# Altium PCB prototype.PcbDoc
Units mm, origin at the board's own origin, x right, y up, seen from the top; angles counter-clockwise.
Board outline 50 x 50 mm, 4 copper layers (Top Layer, GND, VCC, Bottom Layer), stack 0.971 mm thick; 16 components, 13 nets, 60 pads, 0 vias.
Unrouted connection lines stored in the file: 40.
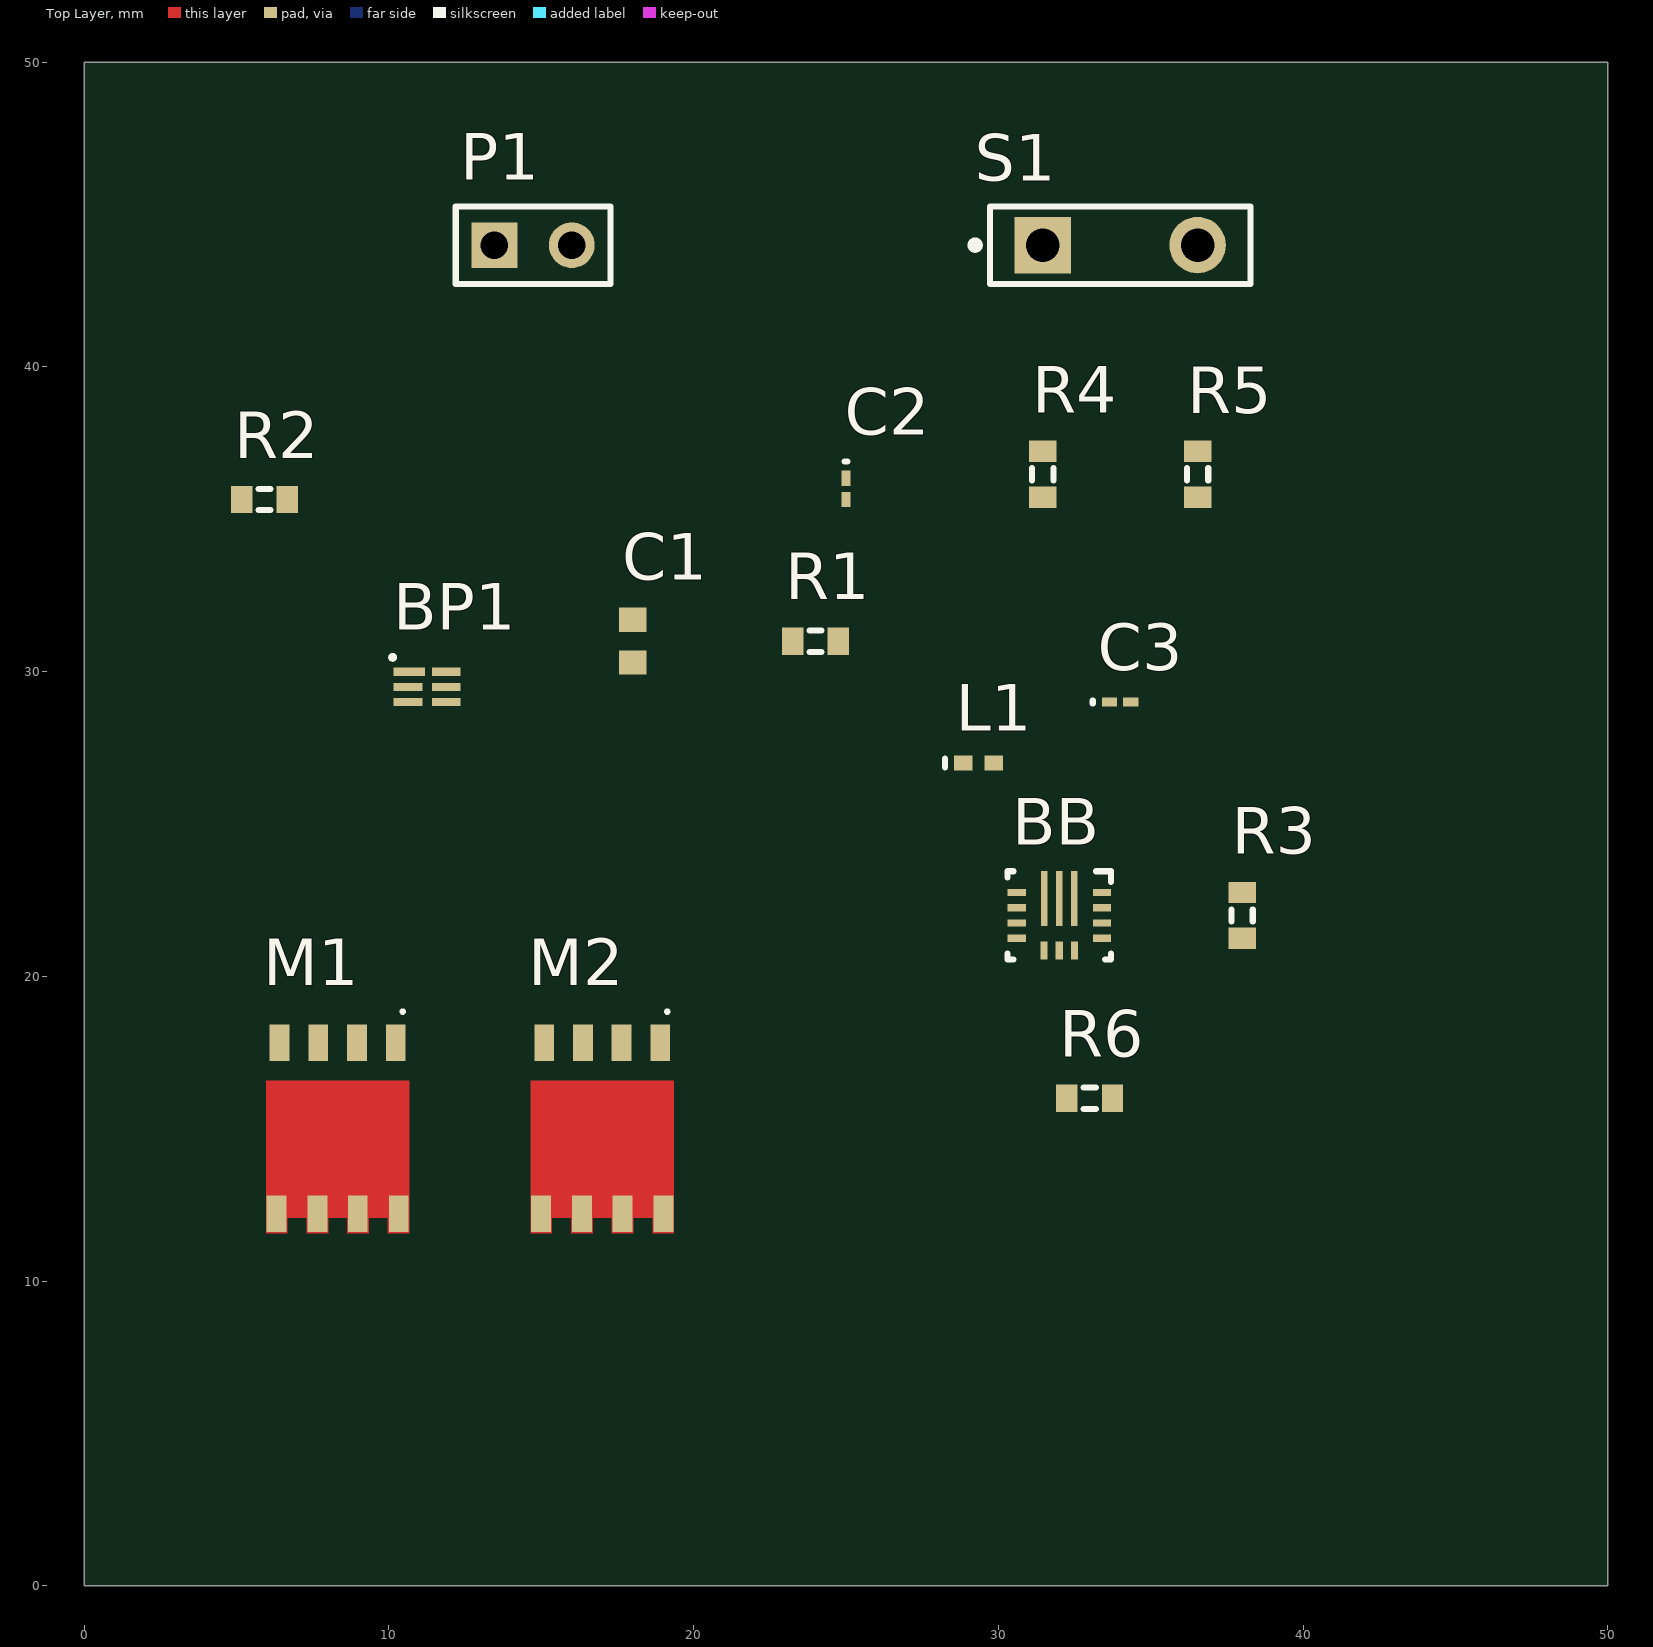
[diagram p0: Top Layer view]
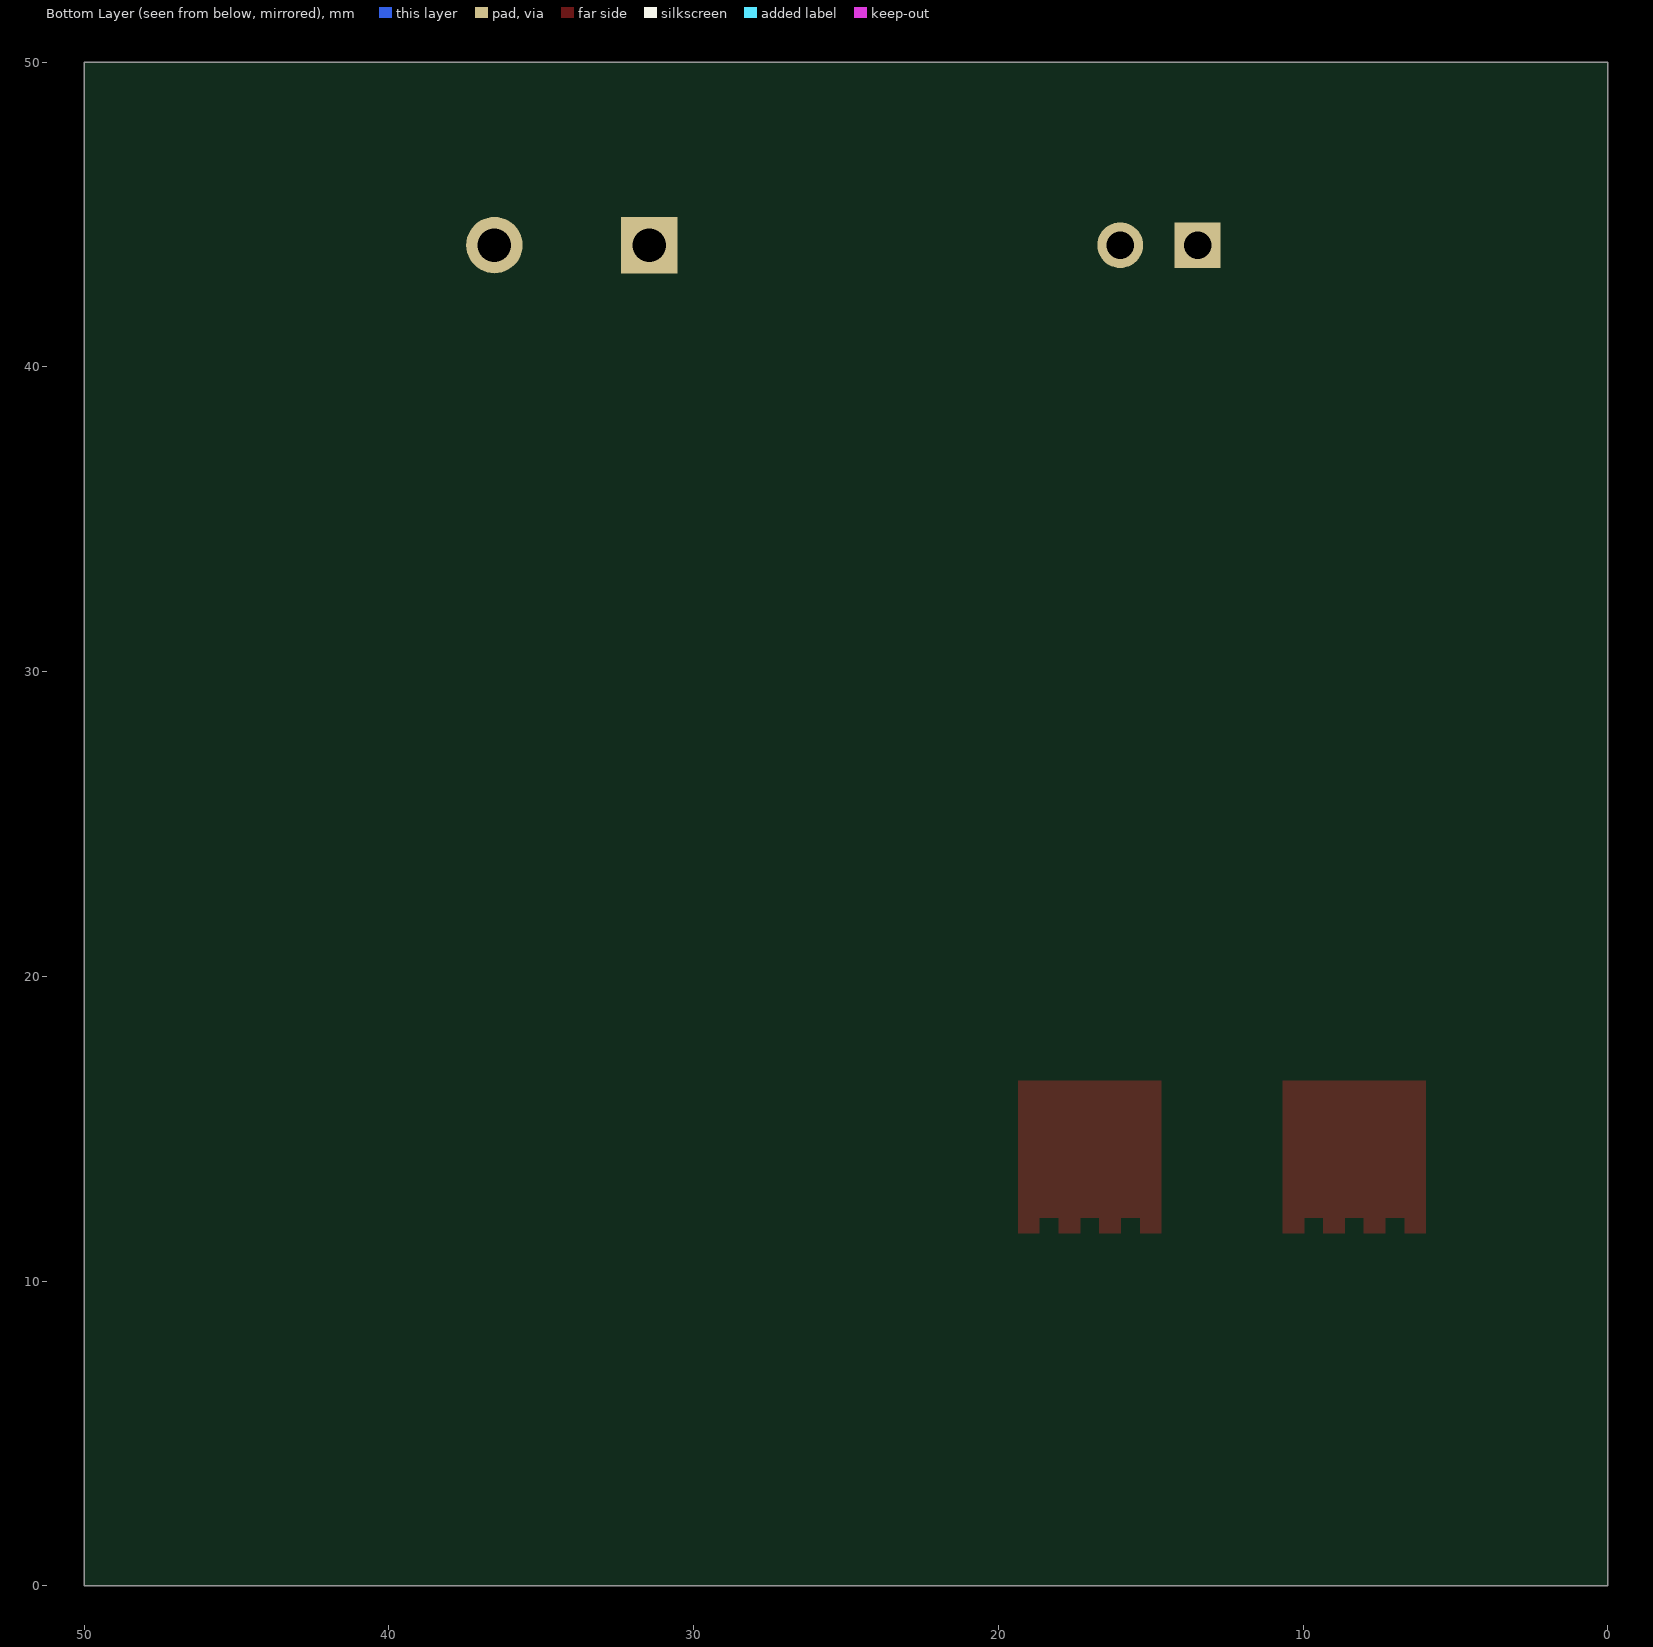
[diagram p1: Bottom Layer view, seen from below]
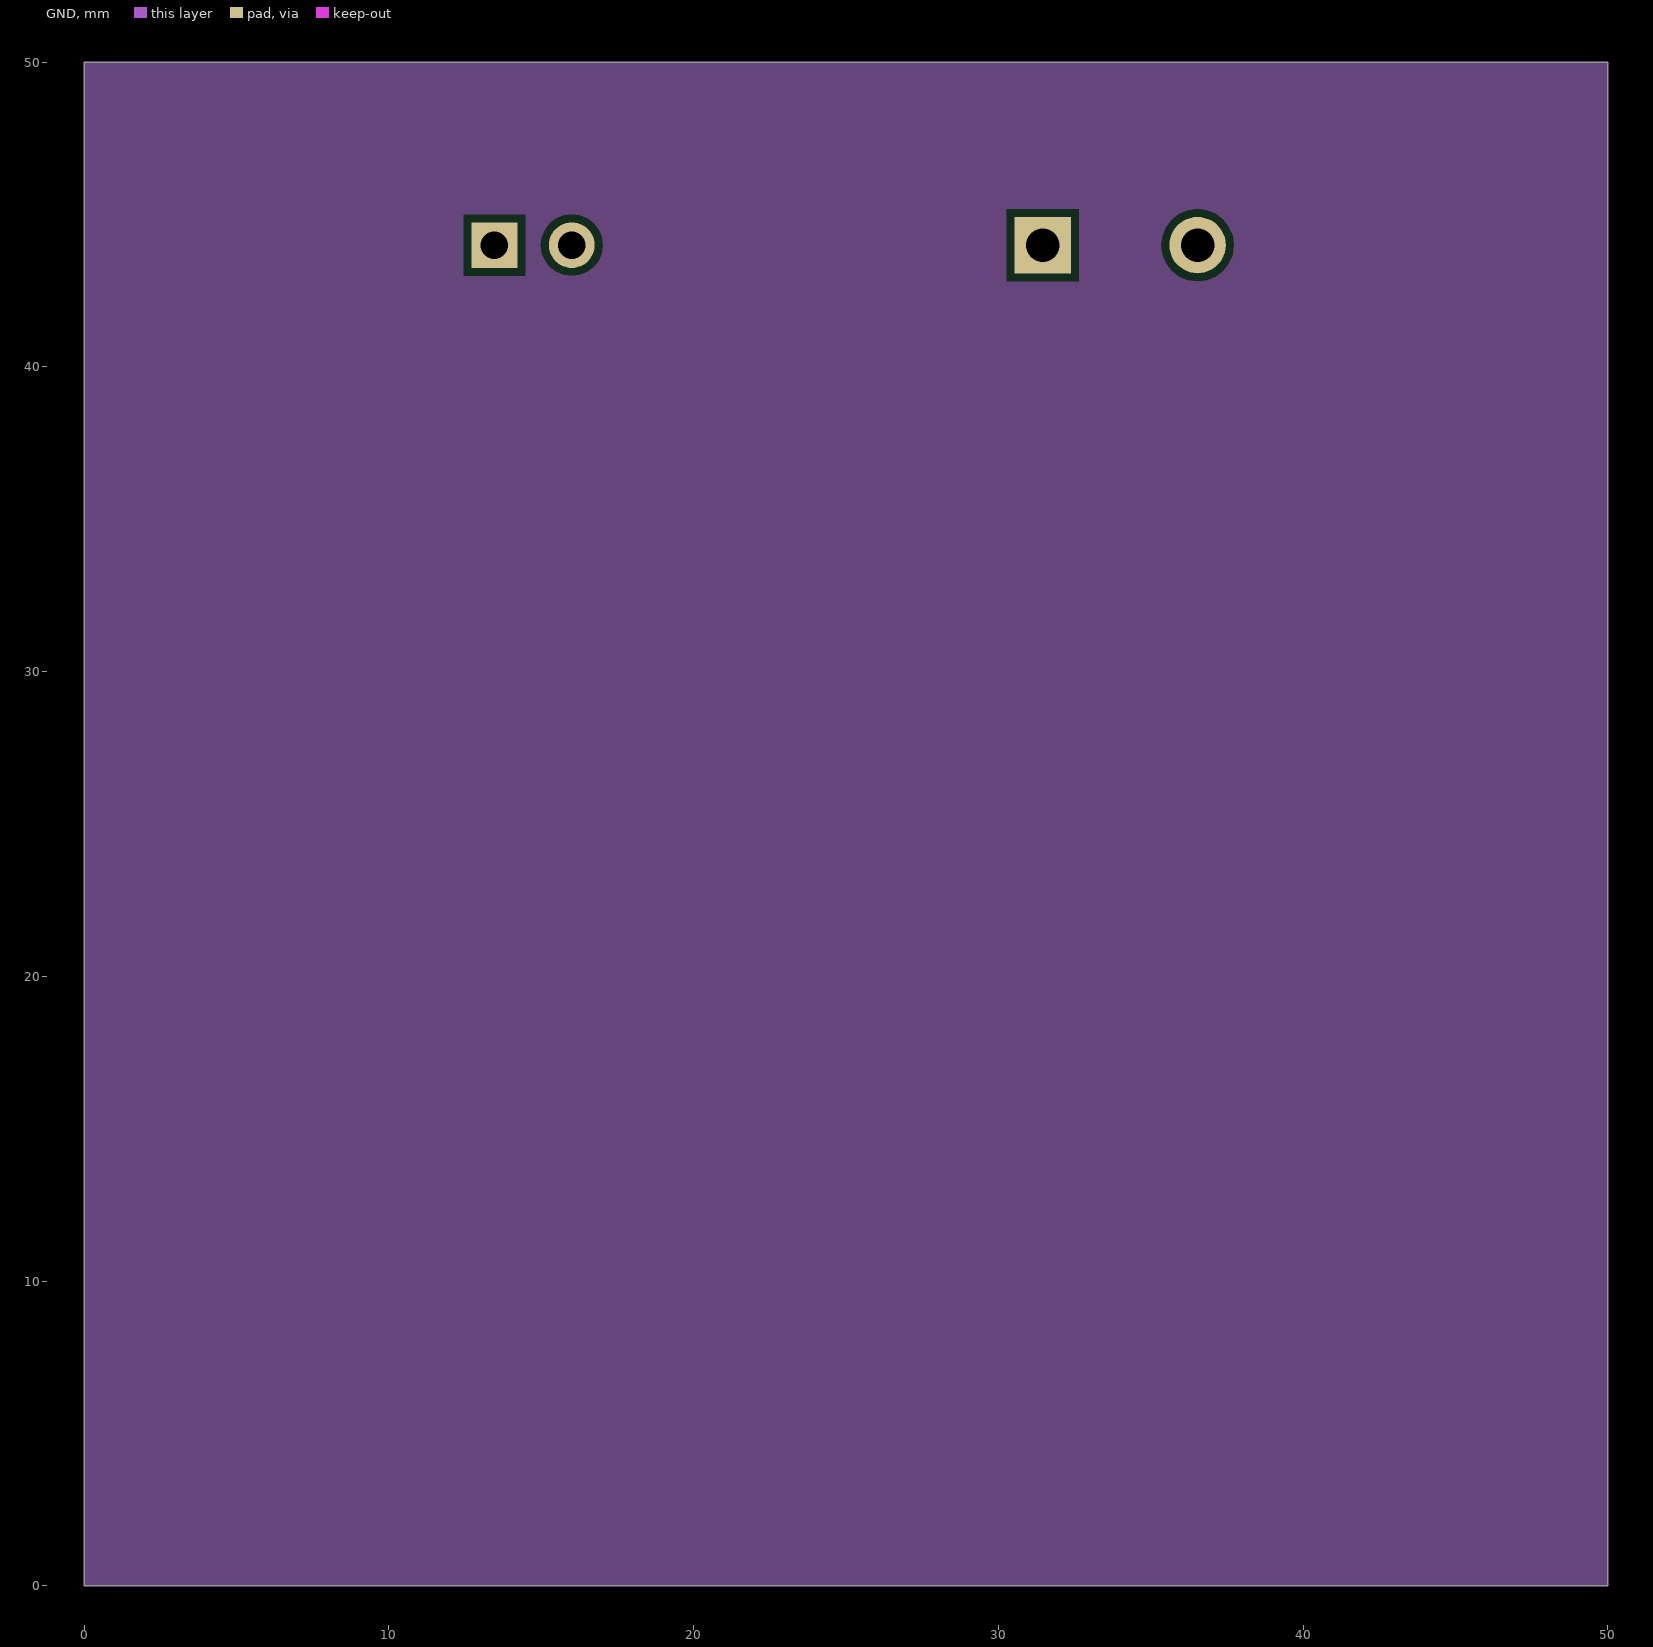
[diagram p2: GND]

## Layer stack, top to bottom
Top Solder: solder mask 0.0102, Solder Resist, Dk 3.5
Top Layer: signal copper 0.0356
Dielectric 1: dielectric 0.32, FR-4, Dk 4.8
GND: signal copper 0.036
Dielectric 2: dielectric 0.254, Dk 4.2
VCC: signal copper 0.036
Dielectric 3: dielectric 0.254, Dk 4.2
Bottom Layer: signal copper 0.0356
Bottom Solder: solder mask 0.0102, Solder Resist, Dk 3.5

## Board outline
0,0 0,50 50,50 50,0

## Design rules (kind name [scope] priority, off if disabled: settings)
Clearance [All] p1: gap=0.254 ignorepadtopadclearanceinfootprint=FALSE except(0: Arc-Hole Track-Hole SMDPad-Hole THPad-Hole Via-Hole Fill-Hole Poly-Hole Region-Hole Text-Hole)
PlaneConnect [All] p1: planeconnectstyle=Direct reliefexpansion=0.508 reliefentries=4 reliefconductorwidth=0.254 reliefairgap=0.254
PolygonConnect [All] p1: connectstyle=Direct reliefconductorwidth=0.254 reliefentries=4 polygonreliefangle="90 Angle" airgapwidth=0.254
RoutingVias [All] p1: holewidth=0.711 width=1.27 viastyle="Through Hole" minholewidth=0.711 minwidth=1.27 maxholewidth=0.711 maxwidth=1.27
SolderMaskExpansion [All] p1: expansion=0.102
Width [All] p1: maxlimit=0.254 minlimit=0.254 preferedwidth=0.254
29 further rules are at their usual default settings.

## Components (designator, comment, footprint, x,y, rotation, side; value= is the part's Value field where it differs from the comment)
BB "TPS630250" RNC0014A 32,22 r270 top
BP1 "BQ2972" SON50P150X150X80-6N 11.255,29.5 r0 top
C1 "0.1uF" 1608[0603] 18,31 r90 top
C2 "10uF" 0603 25,36 r270 top
C3 "47uF" 0603 34,29 r0 top
L1 "1uH" 0402-A 29.35,27 r0 top
M1 "BSC026NE2LS5" INF-PG-TDSON-8-1_V 8.315,15 r180 top
M2 "BSC026NE2LS5" INF-PG-TDSON-8-1_V 17,15 r180 top
P1 "Header 2" HDR1X2 13.46,44 r0 top
R1 "330" J1-0603 24,31 r0 top
R2 "2.2K" J1-0603 5.915,35.65 r180 top
R3 "560K" J1-0603 38,22 r90 top
R4 "1K" J1-0603 31.46,36.48 r90 top
R5 "1K" J1-0603 36.54,36.48 r90 top
R6 "180K" J1-0603 33,16 r0 top
S1 "SW-PB" SPST-2 34,44 r0 top

## Footprints (in the part's own frame and the unit in brackets; to place one, negate y for a bottom-side part, rotate by r counter-clockwise, add the part's x,y. Pads: shape width x height; smd on the part's side, far side on the other; paste and mask are expansions set on the pad)
0402-A [mm] "Chip Inductor, Body 1.0x0.5mm, IPC High Density"
  rect 0.6x0.5 smd: 1(-0.5,0) 2(0.5,0)
  silkscreen extent -1.1,-0.15 -1.1,0.15, body extent -0.55,-0.3 0.55,0.3, height 0.55
0603 [mm] "Chip Inductor, Body 0.6x0.3mm, IPC High Density"
  rect 0.5x0.3 smd: 1(-0.35,0) 2(0.35,0)
  silkscreen extent -0.9,-0.05 -0.9,0.05, body extent -0.33,-0.18 0.33,0.18, height 0.55
1608[0603] [mm] "Chip Capacitor, Body 1.6x0.8mm, IPC High Density"
  rect 0.8x0.9 smd: 1(-0.7,0) 2(0.7,0)
  body extent -0.87,-0.48 0.87,0.48, height 1.3
HDR1X2 [mm] "Connector; Header; 2 Position"
  rect 1.5x1.5 hole 0.9: 1(0,0)
  round 1.5 hole 0.9: 2(2.54,0)
  silkscreen extent -1.27,-1.27 3.81,1.27
INF-PG-TDSON-8-1_V [mm] "TDSON, 8-Leads, Body 6.15x5.15mm, Pitch 1.27mm"
  rect 0.65x1.2 smd: 1(-1.905,-2.825) 1(-0.635,-2.825) 1(0.635,-2.825) 2(1.905,-2.825) 3(-2.007,2.794) 3(-0.66,2.794) 3(0.66,2.794) 3(2.007,2.794)
  Top Layer region: -2.35,2.925 -2.35,-1.575 2.35,-1.575 2.35,2.925
  Top Layer region: -2.35,2.925 -1.65,2.925 -1.65,3.425 -2.35,3.425
  Top Layer region: 1.65,2.925 2.35,2.925 2.35,3.425 1.65,3.425
  Top Layer region: -1.015,2.925 -0.315,2.925 -0.315,3.425 -1.015,3.425
  Top Layer region: 0.315,2.925 1.015,2.925 1.015,3.425 0.315,3.425
  silkscreen extent -2.23,-3.94 -2.03,-3.74, body extent -2.54,-2.93 2.61,2.97, height 1
J1-0603 [mm] "Chip Resistor, Body 1.6x0.8mm, IPC High Density"
  rect 0.7x0.9 smd: 1(-0.75,0) 2(0.75,0)
  silkscreen extent -0.2,-0.35 0.2,0.35, body extent -0.85,-0.48 0.85,0.48, height 0.9
RNC0014A [mm]
  rect 1.79x0.22 smd paste-0.882 mask+0.051: 1(-0.555,0.49) 2(-0.555,0) 3(-0.555,-0.49)
  rect 0.24x0.6 smd paste+0 mask+0.051: 4(-0.75,-1.4) 5(-0.25,-1.4) 6(0.25,-1.4) 7(0.75,-1.4) 11(0.75,1.4) 12(0.25,1.4) 13(-0.25,1.4) 14(-0.75,1.4)
  rect 0.6x0.24 smd paste+0 mask+0.051: 8(1.15,-0.5) 9(1.15,0) 10(1.15,0.5)
  silkscreen extent -1.45,-1.7 1.45,1.7, body extent -1.3,-1.55 1.3,1.55, height 1
SON50P150X150X80-6N [mm]
  rect 1.02x0.27 smd: 1(-0.59,0.5)
  rect 0.94x0.27 smd: 2(-0.63,0) 3(-0.63,-0.5) 4(0.63,-0.5) 5(0.63,0) 6(0.63,0.5)
  silkscreen extent -1.2,0.9 -1.06,1.04
SPST-2 [mm] "Switch; 2 Leads"
  rect 1.85x1.85 hole 1.1: 1(-2.54,0)
  round 1.85 hole 1.1: 2(2.54,0)
  silkscreen extent -4.89,-1.27 4.28,1.27

## Part data
BB: "Buck-boost converter"
BP1: "Battery protection"
C1 C2 C3: library part Cap, "Capacitor", LatestRevisionDate=17-Jul-2002, LatestRevisionNote="Re-released for DXP Platform.", PackageDescription="Radial Cap, Thru-Hole; 2 Leads; 0.3 in Pin Spacing", PackageReference=RAD-0.3, Published=8-Jun-2000, Publisher="Altium Limited"
L1: library part Inductor, "Inductor", Code_IEC=1005, Code_JEITA=0402, LatestRevisionDate=29-May-2009, LatestRevisionNote="IPC-7351 Footprint Added.", PackageDescription="Chip Inductor", PackageReference=0402-A, Published=8-Jun-2000, Publisher="Altium Limited"
M1 M2: "MOSFET"
P1: "Header, 2-Pin", LatestRevisionDate=17-Jul-2002, LatestRevisionNote="Re-released for DXP Platform.", Publisher="Altium Limited"
R1 R2 R3 R4 R5 R6: library part Res3, "Resistor", LatestRevisionDate=29-May-2009, LatestRevisionNote="IPC-7351 Footprint Added.", PackageDescription="Chip Resistor", PackageReference=J1-0603, Published=8-Jun-2000, Publisher="Altium Limited"
S1: "Switch", LatestRevisionDate=17-Jul-2002, LatestRevisionNote="Re-released for DXP Platform.", PackageDescription="Switch; 2 Leads", PackageReference=SPST-2, Published=24-Mar-1999, Publisher="Altium Limited"

## Nets (pads, with @x,y where several pads share a name; then routed paths per layer and width w, separated by ;. In a path a pad name is that pad's centre, name@x,y a point inside that pad or via, vN(x,y) a via of type N, cw(c..) or ccw(c..) an arc to the next point about the centre after c; other vN are vias at no path point)
GND: BB.2 BB.9 BB.10 C2.1 C3.1 M1.1 R2.2 R4.1 R5.1 R6.1
NetBB_1: BB.1 L1.2
NetBB_3: BB.3 L1.1
NetBB_4: BB.4 BB.5 BB.6 BB.7 BB.8 C2.2 P1.2 R1.2
NetBB_11: BB.11 R3.1 R6.2
NetBB_12: BB.12 BB.13 BB.14 C3.2 R3.2 R4.2 S1.1
NetBP1_2: BP1.2 M1.2
NetBP1_3: BP1.3 M2.2
NetBP1_4: BP1.4 C1.1 M2.1 P1.1
NetBP1_5: BP1.5 C1.2 R1.1
NetBP1_6: BP1.6 R2.1
NetM1_3: M1.3 M2.3
NetR5_2: R5.2 S1.2
pads on no net: BP1.1

## Polygon pours and split planes (outlines as drawn)
GND on GND "GND" (solid, pour order 2): 50,50 0,50 0,0 50,0